# Altium PCB PCB1.PcbDoc (part 2 of 2)
Units mm, origin at the board's own origin, x right, y up, seen from the top; angles counter-clockwise.
Board outline 152.4 x 101.6 mm, 4 copper layers (Top Layer, In1, In 2, Bottom Layer), stack 0.602 mm thick; 120 components, 125 nets, 522 pads, 23 vias.
Unrouted connection lines stored in the file: 299.
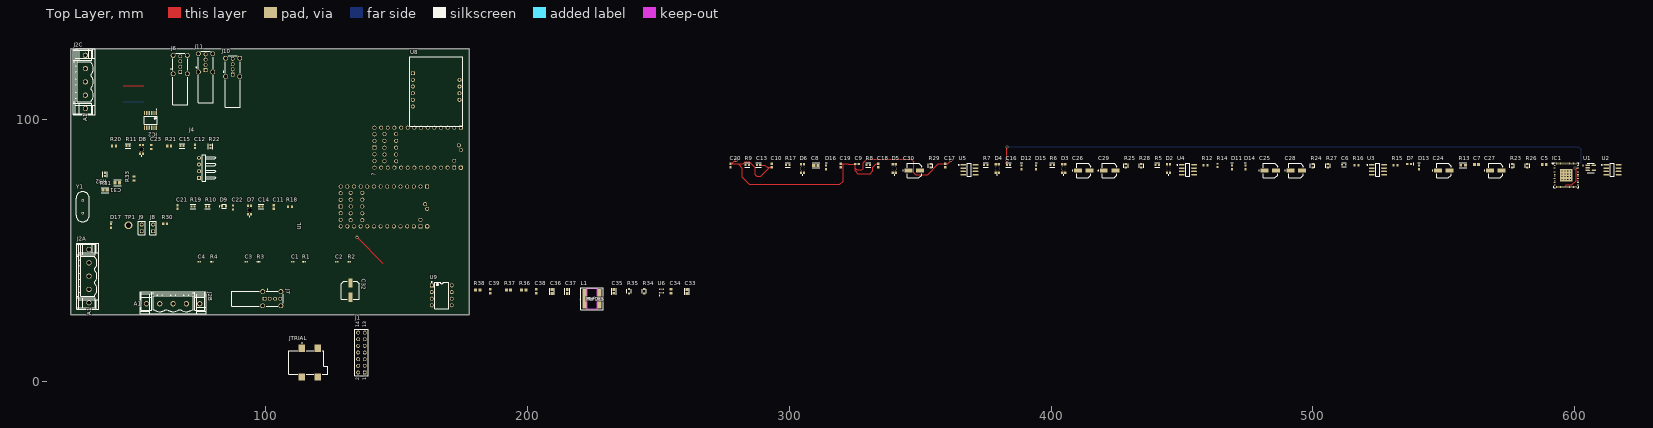
[diagram p0: Top Layer view]

## Via types
v1: diameter 0.5, hole 0.2, Top Layer to Bottom Layer, 16 vias
v2: diameter 1.27, hole 0.711, Top Layer to Bottom Layer, 6 vias
v3: diameter 3, hole 2, Top Layer to Bottom Layer, 1 vias

## Nets (pads, with @x,y where several pads share a name; then routed paths per layer and width w, separated by ;. In a path a pad name is that pad's centre, name@x,y a point inside that pad or via, vN(x,y) a via of type N, cw(c..) or ccw(c..) an arc to the next point about the centre after c; other vN are vias at no path point) (continued)
copper on no net: | length 584.3
  Top Layer w0.254: 45.441,112.731 53.441,112.731 ; v2(134.837,54.864) 144.755,44.946 ; 277.52,82.971 278.065,82.971 ; v2(279.767,84.303) 279.396,84.303 278.065,82.971 ; 288.892,82.525 290.652,82.525 291.505,81.671 292.491,81.671 ; 293.268,81.671 292.491,81.671 ; 319.684,82.971 320.523,82.971 ; 333.908,82.971 333.212,82.971 331.876,81.636 331.876,80.264 330.86,79.248 326.197,79.248 325.181,80.264 325.181,81.28 ; v2(361.772,84.303) 360.441,82.971 359.537,82.971 356.961,82.971 352.882,78.892 348.209,78.892 347.497,79.604 347.497,83.82 346.532,84.785 329.667,84.785 328.193,83.312 328.193,81.178 327.66,80.645 325.816,80.645 325.181,81.28 ; 383.141,82.525 v2(383.141,84.303) v2(383.141,89.408) ; 596.599,74.163 596.599,74.604 596.9,74.905 598.881,74.905 600.558,76.581 v2@600.558,81.363 ; v2(600.187,81.363) v2@600.558,81.363 ; 601.299,81.363 v2@600.558,81.363 ; 278.065,82.971 280.416,82.971 ; 280.416,82.971 282.361,82.971 283.21,83.82 284.734,83.82 287.02,81.534 287.02,78.867 287.579,78.308 289.128,78.308 292.491,81.671 ; 280.416,82.971 282.042,81.346 282.042,77.902 284.759,75.184 319.329,75.184 320.523,76.378 320.523,82.971 ; 320.523,82.971 322.377,82.971 322.468,82.88 325.181,82.88 325.181,81.28
  In1 w0.254: 30.632,77.445 35.128,77.445 51.435,61.138 51.435,56.083 52.654,54.864 v2(134.837,54.864) ; 42.697,102.972 59.411,102.972 64.567,108.128 ; v2(361.772,84.303) v2(383.141,84.303)
  Bottom Layer w0.254: 45.441,106.731 53.441,106.731 ; v2(383.141,89.408) 601.497,89.408 602.513,88.392 602.513,83.689 v2(600.187,81.363)
  other v3: 47.498,59.512

## Text inside footprints (layer, text, board x,y; h text height)
?: Mechanical 7 "COIN CEL" at 146.075,94.92 h0.94 r180; Mechanical 7 "3 VOLT" at 145.567,94.234 h0.94 r180; Mechanical 7 "USB" at 173.253,90.424 h1.97 r270; Mechanical 7 "TEENSY 4.0" at 164.363,89.154 h1.97 r180
J1: Top Overlay "2" at 135.763,0.203 h1.27 r90; Top Overlay "1" at 138.303,0.203 h1.27 r90; Top Overlay "14" at 135.763,20.523 h1.27 r90; Top Overlay "13" at 138.303,20.523 h1.27 r90
J2A: Top Overlay "A1" at 33.226,25.059 h1.5 r90
J2B: Top Overlay "A1" at 49.545,28.737 h1.5
J2C: Top Overlay "A1" at 31.854,99.253 h1.5 r90
L1: Top Overlay "REFDES" at 222.39,30.734 h1.27; Top Overlay "RefDes" at 222.707,30.734 h1.27; Mechanical 13 "RefDes2" at 222.39,30.734 h1.27
UL: Mechanical 7 "COIN CEL" at 133.172,72.441 h0.94 r180; Mechanical 7 "3 VOLT" at 132.664,71.755 h0.94 r180; Mechanical 7 "USB" at 160.35,67.945 h1.97 r270; Mechanical 7 "TEENSY 4.0" at 151.46,66.675 h1.97 r180